# EAGLE board Light Dependent Resistor PCB (EAGLE 9.7.0)
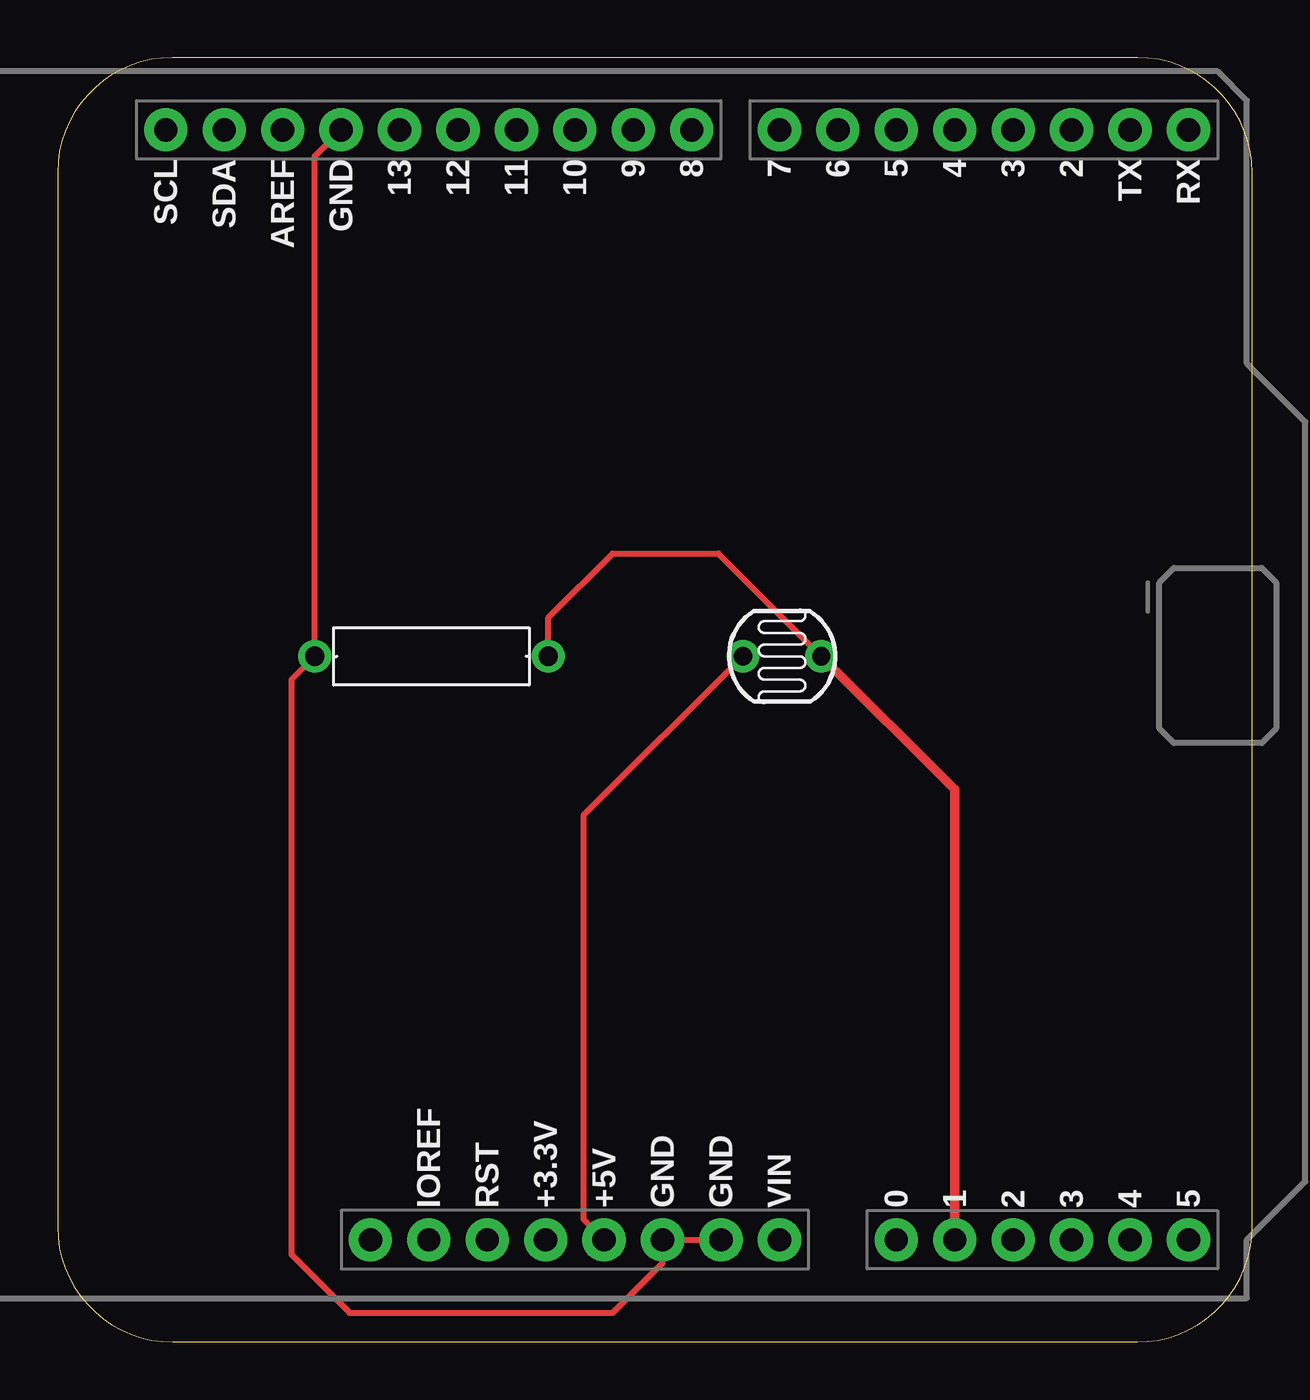
[diagram p0: board, top side]

Size 51.92 x 55.85 mm. Coordinates in mm from the lower left corner, seen from the top.
Outline: 0,5 arc90 5,0 46.92,0 arc90 51.92,5 51.92,50.85 arc90 46.92,55.85 5,55.85 arc90 0,50.85 0,5
Copper layers (1*16): Top 0.035mm / dielectric 1.5mm / Bottom 0.035mm
Design rules "default": minimum track width 6mil, minimum drill 0.35mm, track to track 6mil, track to pad 6mil, pad to pad 6mil, via to via 6mil, smd to smd 6mil, copper to edge 40mil, drill to drill 6mil, minimum pad ring 10mil, minimum via ring 8mil, stop-mask expansion 4mil, vias tented up to drill 0mil, thermal gap 10mil

## Footprints (pad centres in the part's own frame; a part is rotated, then mirrored left to right if it is on the bottom)
GL5528 = drill 0.8 pad 1.4: 1 -1.702,0; 2 1.702,0
RESAD1016W63L850D250B = drill 0.83 pad 1.43: 1 -5.08,0; 2 5.08,0
ARDUINO-UNO-R3-SHIELD = drill 1.016 pad 1.88: 3.3V 24.13,-2.54; 5V 24.13,0; A0 24.13,12.7; A1 24.13,15.24; A2 24.13,17.78; A3 24.13,20.32; A4 24.13,22.86; A5 24.13,25.4; AREF -24.13,-13.97; D2 -24.13,20.32; D3 -24.13,17.78; D4 -24.13,15.24; D5 -24.13,12.7; D6 -24.13,10.16; D7 -24.13,7.62; D8 -24.13,3.81; D9 -24.13,1.27; D10 -24.13,-1.27; D11 -24.13,-3.81; D12 -24.13,-6.35; D13 -24.13,-8.89; GND@0 24.13,2.54; GND@1 24.13,5.08; GND@2 -24.13,-11.43; IOREF 24.13,-7.62; NC 24.13,-10.16; RES 24.13,-5.08; RX -24.13,25.4; SCL -24.13,-19.05; SDA -24.13,-16.51; TX -24.13,22.86; VIN 24.13,7.62

## Placement (x,y rotation side)
R1  PHOTOCELL_GL5528  [GL5528]  31.49,29.81 0 top
R2  1k  [RESAD1016W63L850D250B]  16.25,29.81 0 top
U1  ARDUINO-UNO-R3-SHIELD  [ARDUINO-UNO-R3-SHIELD]  23.75,28.57 270 top

## Library data of the parts
R1 R2 U1 = Tinkercad

## Nets
U1_5V: R1.1 U1.5V
U1_A1: R1.2 R2.2 U1.A1
U1_GND: R2.1 U1.GND@0 U1.GND@1 U1.GND@2

## Tracks (layer width: path | path; a pad name or v marks a point on that pad's centre or on a via)
U1_5V
  Top 0.254: R1.1 22.86,22.88 22.86,5.34 U1.5V
U1_A1
  Top 0.254: R2.2 21.33,31.49 24.13,34.29 28.72,34.29 R1.2
  Top 0.406: R1.2 39,24.01 U1.A1
U1_GND
  Top 0.254: U1.GND@2 11.17,51.55 R2.1 10.16,28.8 10.16,3.81 12.7,1.27 24.13,1.27 26.29,3.44 U1.GND@0 U1.GND@1